# EAGLE board manvnode_old (EAGLE 5.09)
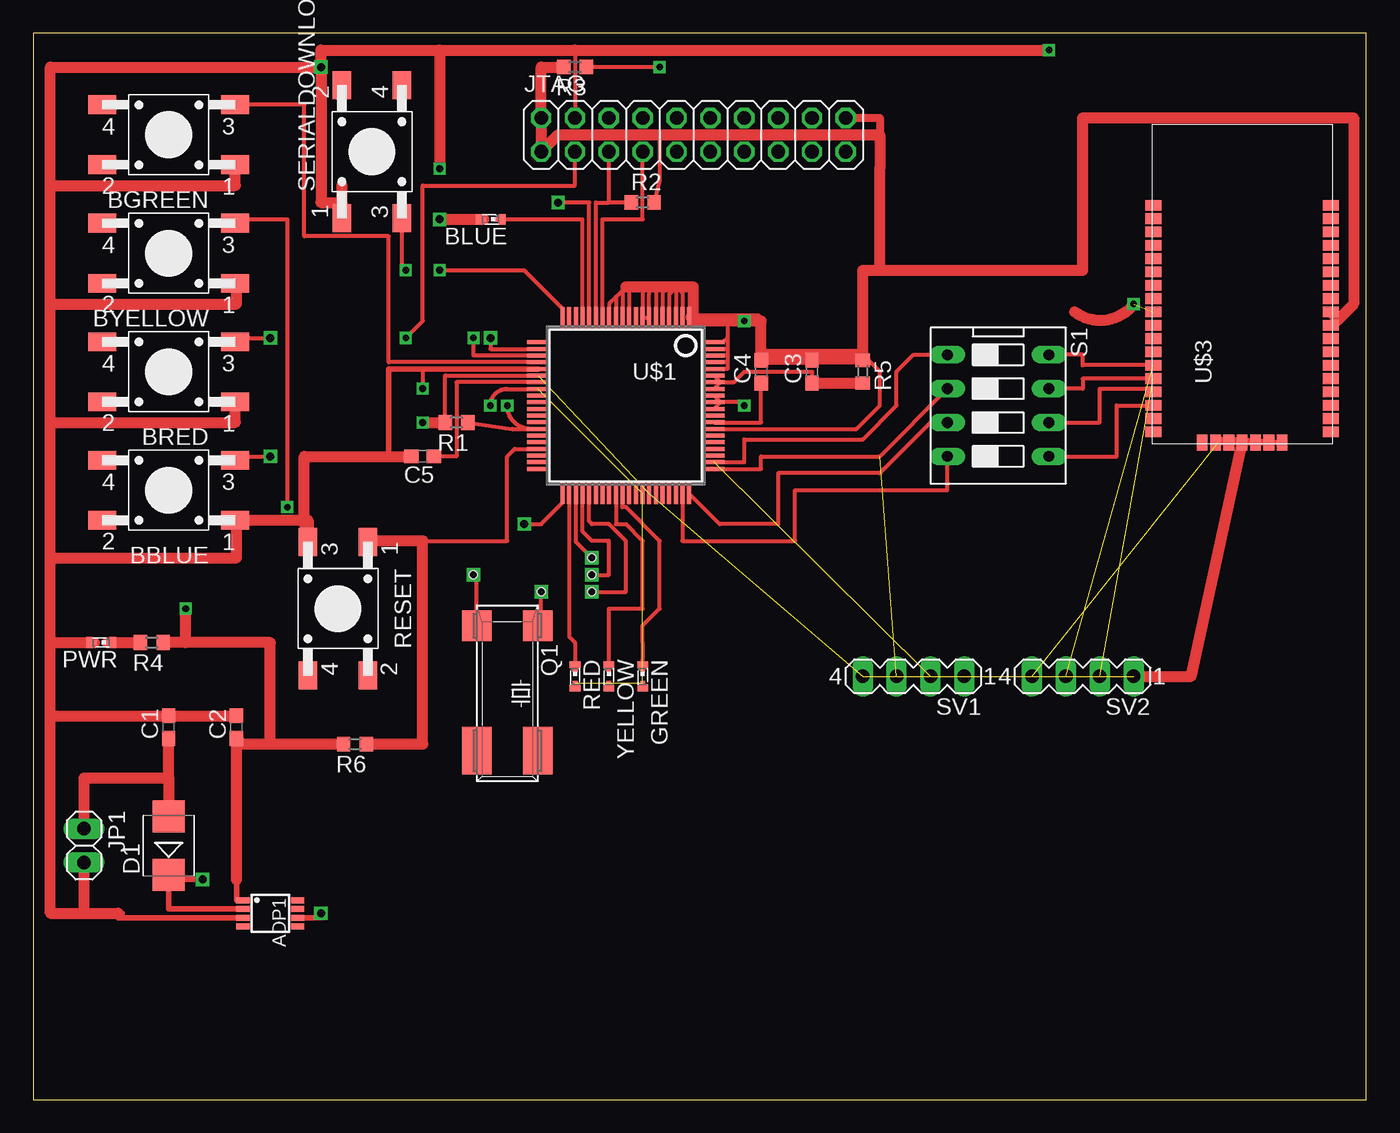
[diagram p0: board, top side]
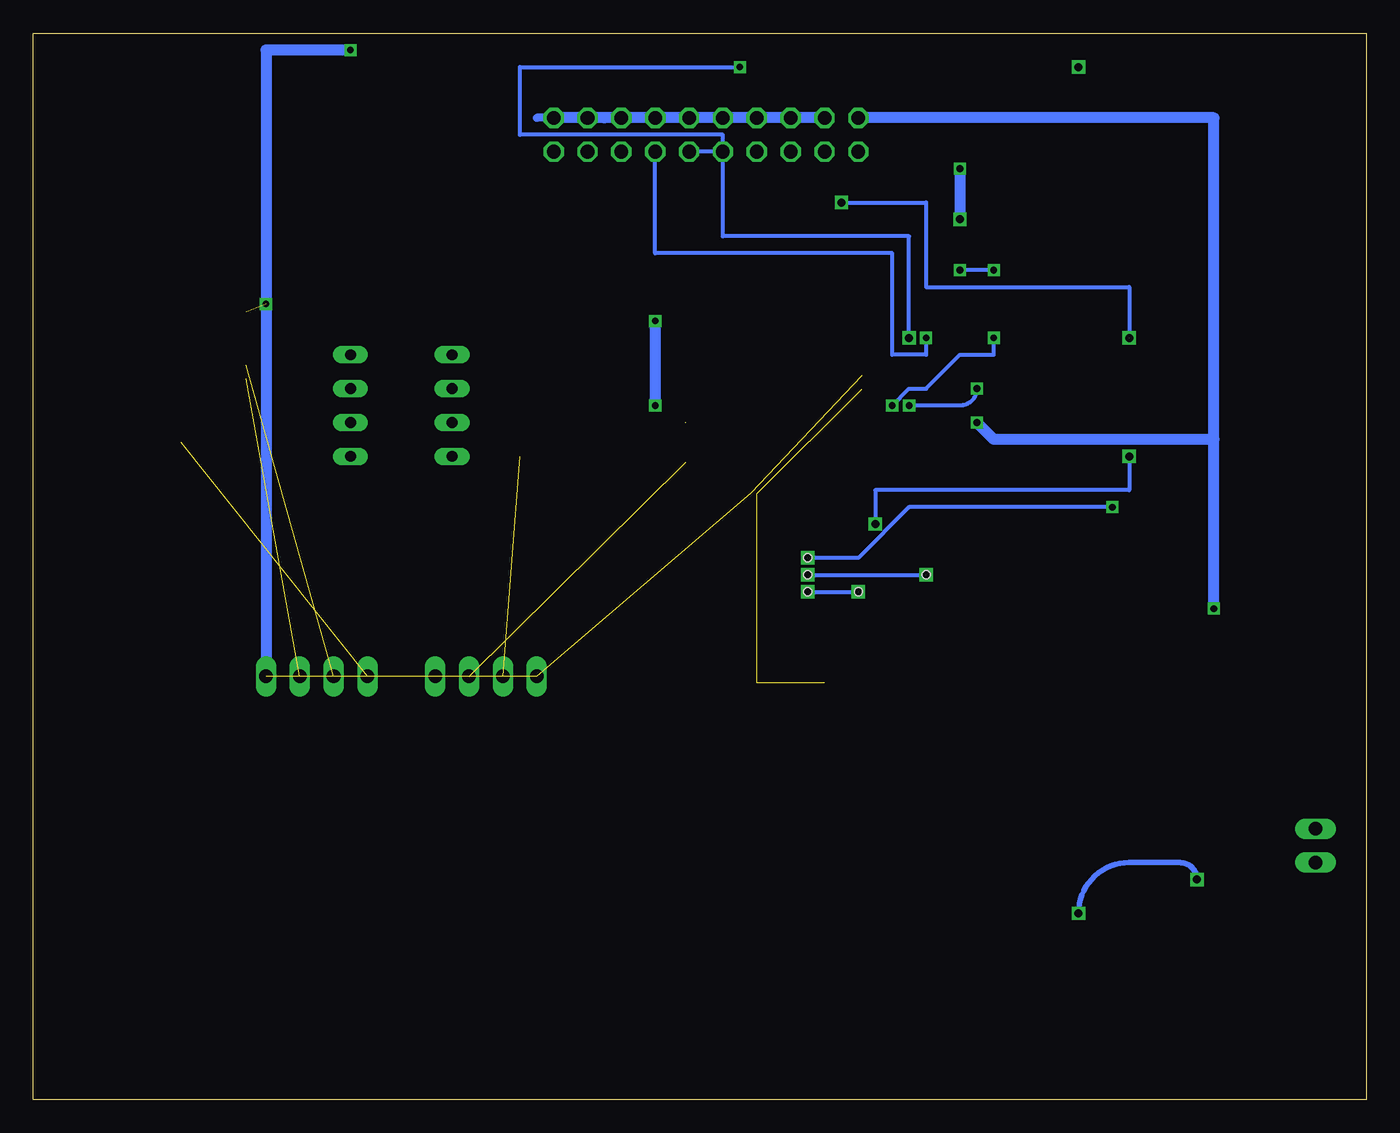
[diagram p1: board, bottom side, seen from below]

Size 100 x 80 mm. Coordinates in mm from the lower left corner, seen from the top.
Outline: 0,0 100,0 100,80 0,80 0,0
Copper layers (1*16): Top 0.035mm / dielectric 1.5mm / Bottom 0.035mm
Design rules "default": minimum track width 10mil, minimum drill 24mil, track to track 8mil, track to pad 8mil, pad to pad 8mil, via to via 8mil, smd to smd 8mil, copper to edge 40mil, drill to drill 8mil, minimum pad ring 10mil, minimum via ring 8mil, stop-mask expansion 4mil, vias tented up to drill 0mil, thermal gap 10mil
Holes 0.6 mm at 38.1,38.1 41.91,38.1 41.91,39.37 41.91,40.64 33.02,39.37

## Footprints (pad centres in the part's own frame; a part is rotated, then mirrored left to right if it is on the bottom)
MSOP8 = smd 0.45 x 1: 1 -0.975,-2.05; 2 -0.325,-2.05; 3 0.325,-2.05; 4 0.975,-2.05; 5 0.975,2.05; 6 0.325,2.05; 7 -0.325,2.05; 8 -0.975,2.05
TASTER-9314_SMD = smd 2.1 x 1.4: 1 -5,2.25; 2 5,2.25; 3 -5,-2.25; 4 5,-2.25
SMARTLED-TTW = smd 0.8 x 0.5: A 0,-0.875; C 0,0.875 | smd 0.35 x 0.35: A@1 0,-0.5; C@1 0,0.5
C0603 = smd 1.1 x 1: 1 -0.85,0; 2 0.85,0
SMB = smd 2.4 x 2.4: A 2.2,0; C -2.2,0
1X02 = drill 1.016 long: 1 -1.27,0; 2 1.27,0
2X10 = drill 1.016 octagon: 1 -11.43,-1.27; 2 -11.43,1.27; 3 -8.89,-1.27; 4 -8.89,1.27; 5 -6.35,-1.27; 6 -6.35,1.27; 7 -3.81,-1.27; 8 -3.81,1.27; 9 -1.27,-1.27; 10 -1.27,1.27; 11 1.27,-1.27; 12 1.27,1.27; 13 3.81,-1.27; 14 3.81,1.27; 15 6.35,-1.27; 16 6.35,1.27; 17 8.89,-1.27; 18 8.89,1.27; 19 11.43,-1.27; 20 11.43,1.27
86SMX = smd 2.286 x 2.184: 1 -5.08,-2.286; 4 -5.08,2.286 | smd 3.556 x 2.184: 2 4.318,-2.286; 3 4.318,2.286
R0603 = smd 1 x 1.1: 1 -0.85,0; 2 0.85,0
DS-04 = drill 0.813 long: 1 -3.81,-3.81; 2 -1.27,-3.81; 3 1.27,-3.81; 4 3.81,-3.81; 5 3.81,3.81; 6 1.27,3.81; 7 -1.27,3.81; 8 -3.81,3.81
MA04-1 = drill 1.016 long: 1 -3.81,0; 2 -1.27,0; 3 1.27,0; 4 3.81,0
SQFP-S-12X12-80 = smd 0.3 x 1.6: 1 -4.75,-6.6; 2 -4.25,-6.6; 3 -3.75,-6.6; 4 -3.25,-6.6; 5 -2.75,-6.6; 6 -2.25,-6.6; 7 -1.75,-6.6; 8 -1.25,-6.6; 9 -0.75,-6.6; 10 -0.25,-6.6; 11 0.25,-6.6; 12 0.75,-6.6; 13 1.25,-6.6; 14 1.75,-6.6; 15 2.25,-6.6; 16 2.75,-6.6; 17 3.25,-6.6; 18 3.75,-6.6; 19 4.25,-6.6; 20 4.75,-6.6; 41 4.75,6.6; 42 4.25,6.6; 43 3.75,6.6; 44 3.25,6.6; 45 2.75,6.6; 46 2.25,6.6; 47 1.75,6.6; 48 1.25,6.6; 49 0.75,6.6; 50 0.25,6.6; 51 -0.25,6.6; 52 -0.75,6.6; 53 -1.25,6.6; 54 -1.75,6.6; 55 -2.25,6.6; 56 -2.75,6.6; 57 -3.25,6.6; 58 -3.75,6.6; 59 -4.25,6.6; 60 -4.75,6.6 | smd 1.6 x 0.3: 21 6.6,-4.75; 22 6.6,-4.25; 23 6.6,-3.75; 24 6.6,-3.25; 25 6.6,-2.75; 26 6.6,-2.25; 27 6.6,-1.75; 28 6.6,-1.25; 29 6.6,-0.75; 30 6.6,-0.25; 31 6.6,0.25; 32 6.6,0.75; 33 6.6,1.25; 34 6.6,1.75; 35 6.6,2.25; 36 6.6,2.75; 37 6.6,3.25; 38 6.6,3.75; 39 6.6,4.25; 40 6.6,4.75; 61 -6.6,4.75; 62 -6.6,4.25; 63 -6.6,3.75; 64 -6.6,3.25; 65 -6.6,2.75; 66 -6.6,2.25; 67 -6.6,1.75; 68 -6.6,1.25; 69 -6.6,0.75; 70 -6.6,0.25; 71 -6.6,-0.25; 72 -6.6,-0.75; 73 -6.6,-1.25; 74 -6.6,-1.75; 75 -6.6,-2.25; 76 -6.6,-2.75; 77 -6.6,-3.25; 78 -6.6,-3.75; 79 -6.6,-4.25; 80 -6.6,-4.75
ZIGBITA2 = smd 0.8 x 1.2: 1 7.4,7.4; 2 6.4,7.4; 3 5.4,7.4; 4 4.4,7.4; 5 3.4,7.4; 6 2.4,7.4; 7 1.4,7.4; 8 0.4,7.4; 9 -0.6,7.4; 10 -1.6,7.4; 11 -2.6,7.4; 12 -3.6,7.4; 13 -4.6,7.4; 14 -5.6,7.4; 15 -6.6,7.4; 16 -7.6,7.4; 17 -8.6,7.4; 18 -9.6,7.4; 26 -9.6,-5.9; 27 -8.6,-5.9; 28 -7.6,-5.9; 29 -6.6,-5.9; 30 -5.6,-5.9; 31 -4.6,-5.9; 32 -3.6,-5.9; 33 -2.6,-5.9; 34 -1.6,-5.9; 35 -0.6,-5.9; 36 0.4,-5.9; 37 1.4,-5.9; 38 2.4,-5.9; 39 3.4,-5.9; 40 4.4,-5.9; 41 5.4,-5.9; 42 6.4,-5.9; 43 7.4,-5.9 | smd 1.2 x 0.8: 19 -10.4,3.75; 20 -10.4,2.75; 21 -10.4,1.75; 22 -10.4,0.75; 23 -10.4,-0.25; 24 -10.4,-1.25; 25 -10.4,-2.25

## Placement (x,y rotation side)
ADP1  ADP3333  [MSOP8]  17.78,13.97 270 top
BBLUE  [TASTER-9314_SMD]  10.16,45.72 180 top
BGREEN  [TASTER-9314_SMD]  10.16,72.39 180 top
BLUE  [SMARTLED-TTW]  34.29,66.04 90 top
BRED  [TASTER-9314_SMD]  10.16,54.61 180 top
BYELLOW  [TASTER-9314_SMD]  10.16,63.5 180 top
C1  0.1µF  [C0603]  10.16,27.94 90 top
C2  10µF  [C0603]  15.24,27.94 90 top
C3  10µF  [C0603]  58.42,54.61 90 top
C4  0.47µF  [C0603]  54.61,54.61 90 top
C5  0.47µF  [C0603]  29.21,48.26 180 top
D1  ES2D  [SMB]  10.16,19.05 90 top
GREEN  [SMARTLED-TTW]  45.72,31.75 180 top
JP1  [1X02]  3.81,19.05 270 top
JTAG  [2X10]  49.53,72.39 0 top
PWR  [SMARTLED-TTW]  5.08,34.29 90 top
Q1  32,768kHz  [86SMX]  35.56,30.48 270 top
R1  100k  [R0603]  31.75,50.8 180 top
R2  100k  [R0603]  45.72,67.31 0 top
R3  100k  [R0603]  40.64,77.47 180 top
R4  100  [R0603]  8.89,34.29 180 top
R5  100  [R0603]  62.23,54.61 270 top
R6  1k  [R0603]  24.13,26.67 180 top
RED  [SMARTLED-TTW]  40.64,31.75 180 top
RESET  [TASTER-9314_SMD]  22.86,36.83 270 top
S1  [DS-04]  72.39,52.07 270 top
SERIALDOWNLOAD  [TASTER-9314_SMD]  25.4,71.12 90 top
SV1  [MA04-1]  66.04,31.75 180 top
SV2  [MA04-1]  78.74,31.75 180 top
U$1  ADUC7026  [SQFP-S-12X12-80]  44.45,52.07 180 top
U$3  ZDM-A1281-A2  [ZIGBITA2]  91.44,59.69 90 top
YELLOW  [SMARTLED-TTW]  43.18,31.75 180 top

## Library data of the parts
ADP1 = marcel
BBLUE BGREEN BRED BYELLOW RESET SERIALDOWNLOAD = Ergaenzung
BLUE GREEN PWR RED YELLOW = led
C1-C5 R1-R6 = resistor
D1 = diode
JP1 JTAG = pinhead
Q1 = crystal
S1 = switch-dil
SV1 SV2 = con-lstb
U$1 = aduc-arm7
U$3 = atmel

## Nets
+3V3: C1.1 D1.A JP1.1
AGND: C3.2 C4.2 U$1.1 U$1.2 U$1.3 U$1.4 U$1.5 U$1.6 U$1.7 U$1.8 U$1.10 U$1.11 U$1.12 U$1.13 U$1.67 U$1.70 U$1.71 U$1.72 U$1.76 U$1.77 U$1.78 U$1.79 U$1.80 U$3.34 U$3.35
DGND: BBLUE.1 BGREEN.1 BLUE.C@1 BRED.1 BYELLOW.1 C5.2 GREEN.C@1 PWR.C@1 RED.C@1 RESET.3 SERIALDOWNLOAD.1 SV1.1 SV2.1 U$1.25 U$1.28 U$1.53 U$3.9 U$3.22 U$3.23 YELLOW.C@1
N$5: S1.4 U$1.59
N$6: S1.3 U$1.60
N$7: PWR.A@1 R4.2
N$8: S1.2 SV1.3 U$1.61
N$9: S1.1 SV1.2 U$1.62
N$10: R6.1 RESET.1 U$1.37
N$11: Q1.1 U$1.44
N$12: RED.A@1 U$1.42
N$13: Q1.4 U$1.45
N$14: SERIALDOWNLOAD.3 U$1.20
N$15: C4.1 U$1.68
N$16: C5.1 U$1.27
N$18: BRED.3 U$1.16
N$19: BYELLOW.3 U$1.43
N$20: BGREEN.3 U$1.24
N$21: BLUE.A@1 U$1.17
N$22: GREEN.A@1 U$1.50
N$23: U$1.49 YELLOW.A@1
N$24: BBLUE.3 U$1.41
N$25: ADP1.2 ADP1.6 D1.C
N$27: ADP1.3 C1.2 C2.2 JP1.2 JTAG.4 JTAG.6 JTAG.8 JTAG.10 JTAG.12 JTAG.14 JTAG.16 JTAG.18 JTAG.20
TCK: JTAG.9 JTAG.11 R3.1 U$1.22
TDI: JTAG.5 R2.1 U$1.15
TDO: JTAG.13 U$1.23
TMS: JTAG.7 U$1.14
TRST: JTAG.3 R1.1 U$1.34
UART_CTS: S1.5 U$3.16
UART_RTS: S1.6 U$3.15
UART_RXD: S1.7 SV2.2 U$3.14
UART_TXD: S1.8 SV2.3 U$3.13
VCC: C3.1 R5.2 U$1.73 U$1.74 U$1.75
VDD: ADP1.1 C2.1 JTAG.1 JTAG.2 R1.2 R2.2 R3.2 R4.1 R5.1 R6.2 SV1.4 SV2.4 U$1.26 U$1.54 U$3.24 U$3.25

## Tracks (layer width: path | path; a pad name or v marks a point on that pad's centre or on a via)
+3V3
  Top 0.813: JP1.1 3.81,24.13 10.16,24.13 | 10.16,24.13 D1.A | 10.16,24.13 C1.1
AGND  (via drill 0.5)
  Top 0.305: U$1.67 61.75,50.32 63.5,52.07 63.5,54.61 62.23,55.88 | 51.55,52.32 U$1.71 | v53.34,52.07 53.09,52.32 51.55,52.32 | U$1.13 43.2,59.71 43.7,60.21 | 43.7,60.21 U$1.12 | 44.2,60.71 43.7,60.21 | 44.2,60.71 U$1.11 | 44.2,60.71 44.45,60.96 44.7,60.71 U$1.10 | 45.72,60.96 45.7,60.94 U$1.8 U$1.7 46.2,60.48 | U$1.6 46.7,60.67 46.99,60.96 47.2,60.75 U$1.5 | 48.2,60.9 U$1.3 | 48.2,60.9 48.26,60.96 48.7,60.52 U$1.2 | U$1.4 47.7,60.4 48.2,60.9 | U$1.80 51.74,56.82 52.07,57.15 | 52.07,58.42 52.07,57.15 | 51.55,52.32 U$1.70 | 51.55,52.32 U$1.72 | 52.07,56.32 U$1.79 | 52.07,57.15 52.07,56.32 | 52.07,55.82 U$1.78 | 52.07,56.32 52.07,55.82 | 52.07,55.32 U$1.77 | 52.07,55.82 52.07,55.32 | U$1.76 52.07,54.82 52.07,55.32
  Top 0.61: U$1.1 54.36,58.67 54.61,58.42 | 54.61,55.88 C4.2 C3.2 61.81,55.46 62.23,55.88
  Top 0.813: 63.5,62.23 78.74,62.23 78.74,73.66 99.06,73.66 99.06,59.69 97.79,58.42 | U$3.34 97.46,58.09 97.79,58.42 | 97.79,58.42 97.79,58.64 U$3.35 | 63.5,62.23 63.5,69.85 | 63.5,62.23 62.23,62.23 62.23,55.88 54.61,55.88 54.61,58.42 v53.34,58.42 52.07,58.42 49.53,58.42 49.53,60.96 48.26,60.96 46.99,60.96 45.72,60.96 44.45,60.96
  Bottom 0.813: v53.34,58.42 v53.34,52.07
DGND  (via drill 0.5, 0.6)  (6 unrouted)
  Top 0.305: 27.94,48.26 C5.2 | U$1.28 35.54,53.32 arc90 v34.29,52.07 | 29.21,54.82 v29.21,53.34
  Top 0.406: U$3.22 U$3.23 | U$1.25 29.21,54.82 26.67,54.82 26.67,48.26
  Top 0.813: BGREEN.1 15.16,68.58 1.27,68.58 | 1.27,59.69 1.27,68.58 | 1.27,59.69 15.24,59.69 15.24,61.25 BYELLOW.1 | BRED.1 15.16,50.8 1.27,50.8 | 1.27,50.8 1.27,59.69 | 1.27,40.64 15.24,40.64 15.24,43.18 15.16,43.18 BBLUE.1 20.61,43.47 RESET.3 20.61,43.18 20.32,43.18 20.32,48.26 26.67,48.26 27.94,48.26 | 1.27,40.64 1.27,50.8 | 23.15,68.58 SERIALDOWNLOAD.1 23.15,67.31 21.59,67.31 v21.59,77.47 | v21.59,77.47 1.27,77.47 1.27,68.58 | v30.48,66.04 BLUE.C@1 | U$3.22 86.88,31.75 SV2.1 | PWR.C@1 1.27,34.29 1.27,40.64 | v21.59,77.47 21.59,78.74 30.48,78.74 | 30.48,78.74 v30.48,69.85 | 30.48,78.74 v76.2,78.74 | v82.55,59.69 arc-90 78.14,59.09
  Bottom 0.305: v34.29,52.07 30.48,52.07 arc-90 v29.21,53.34
  Bottom 0.813: v30.48,69.85 v30.48,66.04 | v76.2,78.74 82.55,78.74 v82.55,59.69 SV2.1
N$1  (via drill 0.6)
  other vias: 30.48,66.04
N$2  (via drill 0.6)
  other vias: 36.83,43.18
N$3  (via drill 0.6)
  other vias: 17.78,57.15
N$4  (via drill 0.6)
  other vias: 41.91,40.64
N$5
  Top 0.305: U$1.59 48.7,41.91 57.15,41.91 57.15,45.72 68.58,45.72 S1.4
N$6
  Top 0.305: S1.3 67.31,50.8 63.5,46.99 55.88,46.99 55.88,43.18 51.49,43.18 U$1.60
N$7
  Top 0.813: PWR.A@1 R4.2
N$8  (1 unrouted)
  Top 0.305: U$1.61 54.61,47.32 54.61,48.26 63.5,48.26 S1.2
N$9  (1 unrouted)
  Top 0.305: S1.1 66.04,55.88 64.77,54.61 64.77,52.07 62.23,49.53 53.34,49.53 53.34,47.82 U$1.62
N$10
  Top 0.305: U$1.37 36.12,48.82 35.56,48.26 35.56,41.91 29.21,41.91 | 25.4,41.91 25.19,41.91 RESET.1
  Top 0.813: 25.4,41.91 29.21,41.91 29.21,26.67 R6.1
N$11  (via drill 0.6)  (1 unrouted)
  Top 0.305: Q1.1 33.27,39.12 33.02,39.37 | U$1.44 41.2,42.62 41.91,41.91 43.18,41.91 43.18,39.37 v41.91,39.37
  Bottom 0.305: v41.91,39.37 33.02,39.37
N$12
  Top 0.305: U$1.42 40.2,34.73 40.64,34.29 RED.A@1
N$13  (via drill 0.6)  (1 unrouted)
  Top 0.305: U$1.45 41.7,43.39 41.91,43.18 43.18,43.18 44.45,41.91 44.45,38.1 v41.91,38.1 | Q1.4 38.1,35.81 38.1,38.1
  Bottom 0.305: v41.91,38.1 38.1,38.1
N$14  (via drill 0.5)
  Top 0.305: U$1.20 39.7,59.36 36.83,62.23 v30.48,62.23 | SERIALDOWNLOAD.3 27.65,62.52 v27.94,62.23
  Bottom 0.305: v27.94,62.23 v30.48,62.23
N$15  (1 unrouted)
  Top 0.305: C4.1 54.61,50.8 51.07,50.8
N$16
  Top 0.305: U$1.27 31.75,53.82 31.75,48.26 C5.1
N$17  (via drill 0.6)
  other vias: 41.91,39.37
N$18  (via drill 0.6)  (1 unrouted)
  Top 0.305: U$1.16 41.7,67.31 v39.37,67.31 | BRED.3 15.16,57.15 17.78,57.15
  Bottom 0.305: v39.37,67.31 33.02,67.31 33.02,60.96 17.78,60.96 17.78,57.15
N$19  (via drill 0.5)  (1 unrouted)
  Top 0.305: U$1.43 40.7,41.85 41.91,40.64 | BYELLOW.3 15.16,66.04 19.05,66.04 v19.05,44.45
  Bottom 0.305: v19.05,44.45 34.29,44.45 38.1,40.64 41.91,40.64
N$20
  Top 0.305: BGREEN.3 20.32,74.64 20.32,64.77 26.67,64.77 26.67,55.32 U$1.24
N$21
  Top 0.305: BLUE.A@1 41.2,66.04 U$1.17
N$22  (1 unrouted)
  Top 0.305: U$1.50 44.2,44.45 44.45,44.45 46.99,41.91 46.99,36.83 45.72,35.56 45.72,34.29 45.72,33.02 GREEN.A@1
N$23
  Top 0.305: YELLOW.A@1 43.18,36.83 45.72,36.83 45.72,41.91 44.45,43.18 43.7,43.18 U$1.49
N$24  (via drill 0.6)
  Top 0.305: BBLUE.3 15.16,48.26 v17.78,48.26 | v36.83,43.18 38.1,43.18 39.7,44.78 U$1.41
  Bottom 0.305: v17.78,48.26 17.78,45.72 36.83,45.72 v36.83,43.18
N$25  (via drill 0.6)
  Top 0.406: ADP1.6 21.59,13.64 v21.59,13.97 | ADP1.2 10.16,14.29 D1.C 10.16,16.51 v12.7,16.51
  Bottom 0.406: v21.59,13.97 arc90 17.78,17.78 13.97,17.78 arc90 v12.7,16.51
N$26  (via drill 0.6)
  other vias: 41.91,38.1
N$27
  Top 0.305: 40.64,78.74 JTAG.4
  Top 0.406: 6.67,13.97 6.35,13.97 6.35,13.64 ADP1.3
  Top 0.61: JTAG.20 63.5,73.66 63.5,62.23
  Top 0.813: 3.81,13.97 1.27,13.97 1.27,28.79 | 3.81,13.97 6.35,13.97 | 3.81,13.97 JP1.2 | C2.2 C1.2 1.27,28.79 | 1.27,28.79 1.27,77.47 21.59,77.47 21.59,78.74 40.64,78.74
  Bottom 0.61: JTAG.20 62.23,73.66
  Bottom 0.813: JTAG.4 JTAG.6 JTAG.8 JTAG.10 JTAG.12 JTAG.14 JTAG.16 57.15,73.66 JTAG.18 JTAG.20
N$28  (via drill 0.6)
  other vias: 33.02,39.37
N$29  (via drill 0.6)
  other vias: 38.1,38.1
N$30  (via drill 0.6)
  other vias: 21.59,13.97
N$31  (via drill 0.6)
  other vias: 12.7,16.51
N$32  (via drill 0.5)
  other vias: 34.29,52.07
N$33  (via drill 0.5)
  other vias: 35.56,52.07
N$34  (via drill 0.5)
  other vias: 29.21,50.8
N$35  (via drill 0.5)
  other vias: 11.43,36.83
N$36  (via drill 0.5)
  other vias: 30.48,69.85
N$37  (via drill 0.5)
  other vias: 19.05,44.45
N$38  (via drill 0.5)
  other vias: 76.2,78.74
N$39  (via drill 0.5)
  other vias: 53.34,52.07
TCK  (via drill 0.5, 0.6)
  Top 0.305: U$1.22 34.29,56.32 v34.29,57.15 | v46.99,77.47 R3.1
  Bottom 0.305: JTAG.9 48.26,64.77 34.29,64.77 v34.29,57.15 | JTAG.9 JTAG.11 | JTAG.9 48.26,72.39 63.5,72.39 63.5,77.47 v46.99,77.47
TDI
  Top 0.305: 43.18,67.31 JTAG.5 | U$1.15 42.2,67.31 43.18,67.31 | R2.1 43.18,67.31
TDO  (via drill 0.5)
  Top 0.305: U$1.23 33.02,55.82 v33.02,57.15
  Bottom 0.305: JTAG.13 53.34,63.5 35.56,63.5 35.56,55.88 33.02,55.88 v33.02,57.15
TMS
  Top 0.305: U$1.14 42.7,66.04 45.72,66.04 JTAG.7
TRST  (via drill 0.5)
  Top 0.305: R1.1 35.93,50.32 U$1.34 37.31,50.32 arc-90 v35.56,52.07 | v27.94,57.15 29.21,58.42 29.21,68.58 40.64,68.58 JTAG.3
  Bottom 0.305: v35.56,52.07 34.29,53.34 33.02,53.34 30.48,55.88 27.94,55.88 v27.94,57.15
UART_CTS
  Top 0.305: S1.5 81.28,48.26 81.28,52.07 84.04,52.07 U$3.16
UART_RTS
  Top 0.305: S1.6 80.01,50.8 80.01,53.34 84.04,53.34 U$3.15
UART_RXD  (1 unrouted)
  Top 0.305: U$3.14 78.74,54.09 78.74,53.34 S1.7
UART_TXD  (1 unrouted)
  Top 0.305: U$3.13 78.74,55.09 78.74,55.88 S1.8
VCC
  Top 0.305: 51.55,53.82 U$1.74 | C3.1 58.42,54.61 53.34,54.61 52.55,53.82 52.07,53.82 51.55,53.82 | 51.55,53.82 U$1.75 | U$1.73 51.55,53.82
  Top 0.813: C3.1 R5.2
VDD  (via drill 0.5)  (4 unrouted)
  Top 0.305: U$1.26 30.9,54.32 R1.2 | R2.2 46.99,69 46.99,72.39
  Top 0.406: ADP1.1 15.24,14.95 15.24,16.51 | U$3.24 88.9,49.29 88.9,49.53 89.88,49.53 U$3.25
  Top 0.61: 63.5,69.85 63.5,62.23 62.23,62.23 R5.1
  Top 0.813: 15.24,16.51 C2.1 15.66,26.67 17.78,26.67 | 17.78,26.67 R6.2 | 11.43,34.29 17.78,34.29 17.78,26.67 | 11.43,34.29 R4.1 | v29.21,50.8 R1.2 | 11.43,34.29 v11.43,36.83 | R3.2 38.1,77.47 JTAG.2 JTAG.1 39.37,72.39 46.99,72.39 63.5,72.39 63.5,69.85
  Bottom 0.813: v29.21,50.8 27.94,49.53 11.43,49.53 | v11.43,36.83 11.43,49.53 | JTAG.2 11.43,73.66 11.43,49.53